# Altium PCB NEH.PcbDoc
Units mm, origin at the board's own origin, x right, y up, seen from the top; angles counter-clockwise.
Board outline 18 x 13 mm, 2 copper layers (Top Layer, Bottom Layer), stack 1.095 mm thick; 14 components, 21 nets, 49 pads, 0 vias.
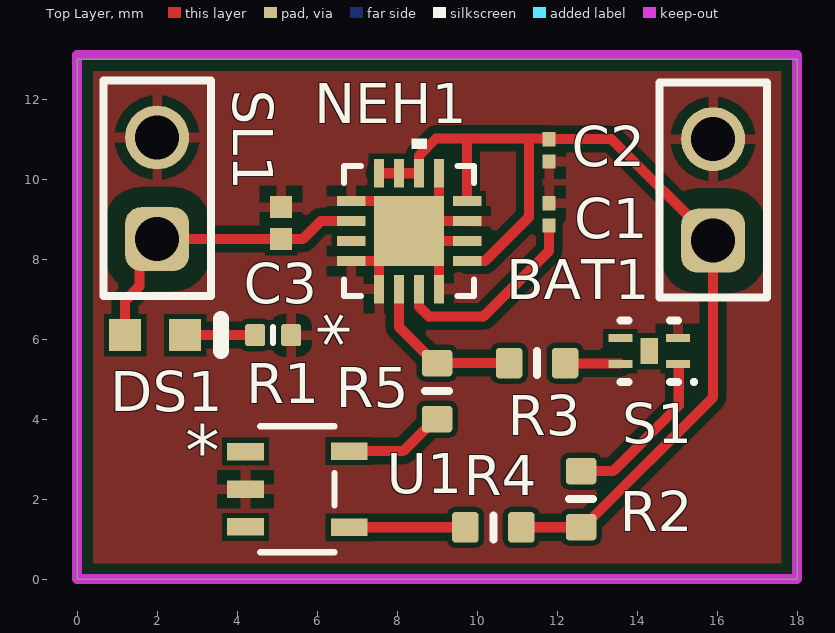
[diagram p0: Top Layer view]
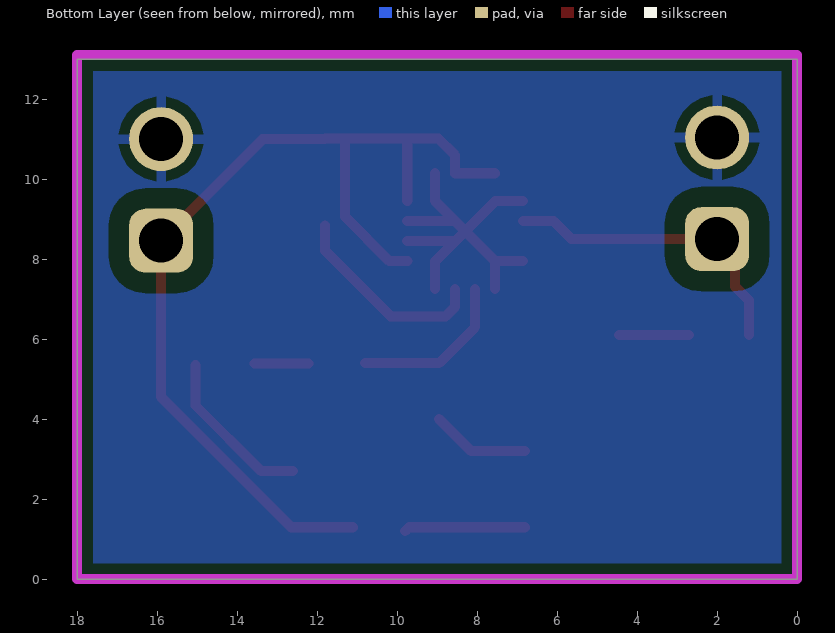
[diagram p1: Bottom Layer view, seen from below]
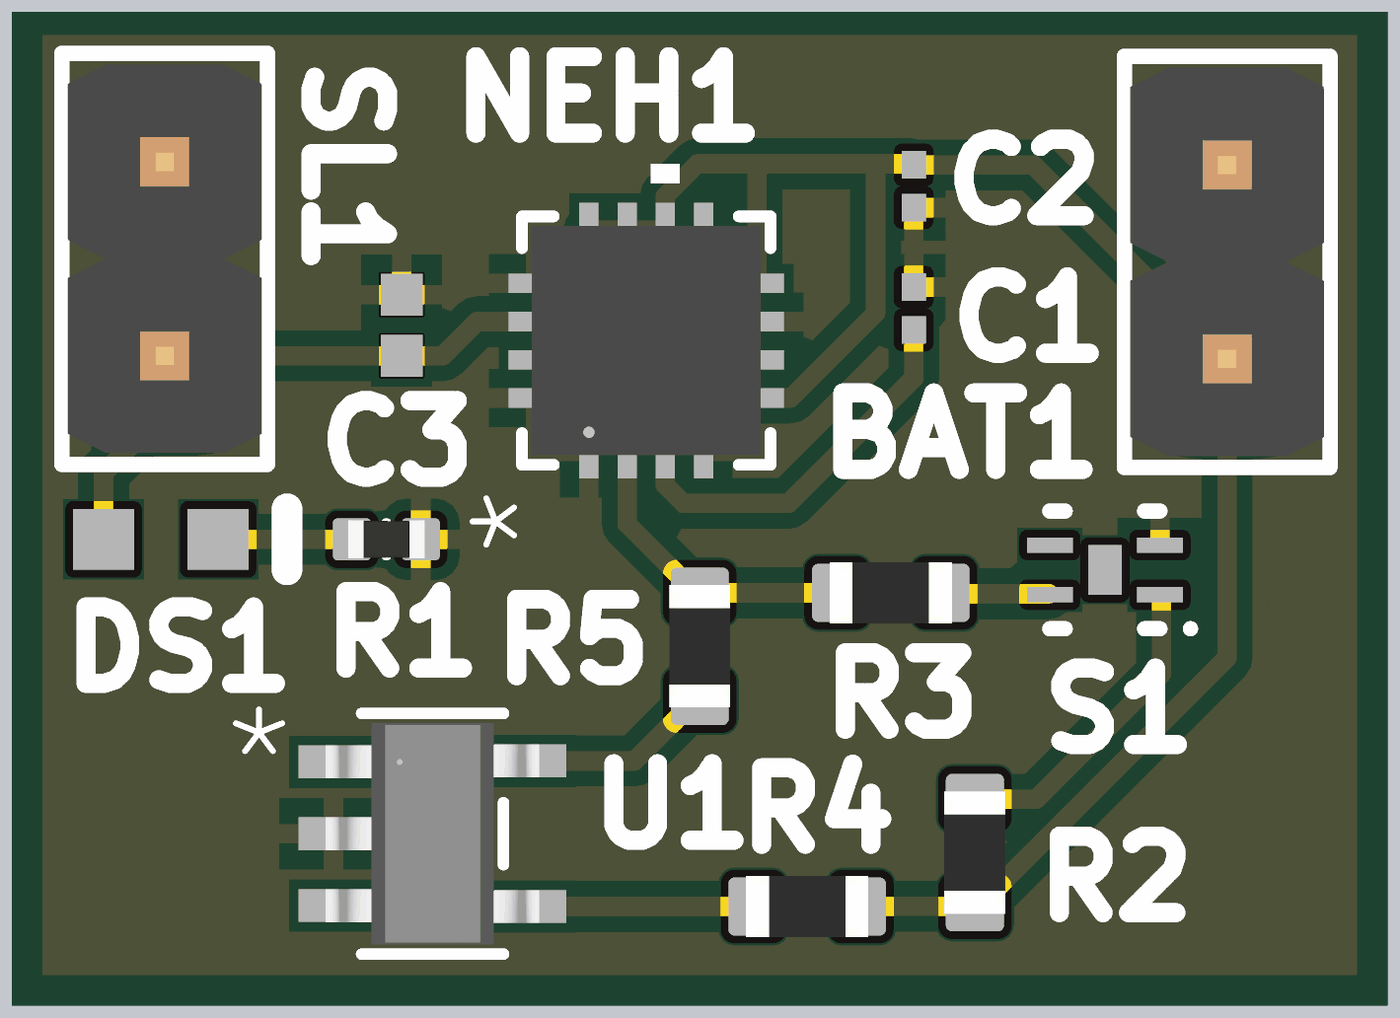
[diagram p2: 3D render of the assembled board from above, using the file's embedded part models]

## Layer stack, top to bottom
Top Solder: solder mask 0.0102, Solder Resist, Dk 3.5
Top Layer: signal copper 0.0152
Dielectric 1: dielectric 1.065, FR-4, Dk 4.8
Bottom Layer: signal copper 0.0152
Bottom Solder: solder mask 0.0102, Solder Resist, Dk 3.5

## Board outline
0,0 18,0 18,13 0,13

## Design rules (kind name [scope] priority, off if disabled: settings)
Clearance [All] p1: gap=0.2 ignorepadtopadclearanceinfootprint=FALSE except(0.127: SMDPad-SMDPad SMDPad-THPad SMDPad-Via SMDPad-Fill SMDPad-Poly SMDPad-Region SMDPad-Text; 0.254: Arc-Via Track-Via Via-Via; 0.5: Arc-Hole Track-Hole SMDPad-Hole THPad-THPad THPad-Via THPad-Fill THPad-Poly THPad-Region THPad-Text THPad-Hole Via-Hole Fill-Hole Poly-Hole Region-Hole Text-Hole)
MinimumSolderMaskSliver [All] p1: minsoldermaskwidth=0.1
PolygonConnect [All] p1: connectstyle=Relief reliefconductorwidth=0.254 reliefentries=4 polygonreliefangle="90 Angle" airgapwidth=0.254
RoutingVias [All] p1: holewidth=0.3 width=0.5 viastyle="Through Hole" minholewidth=0.3 minwidth=0.5 maxholewidth=0.3 maxwidth=0.5
SilkToSolderMaskClearance [IsPad] p1: minsilkscreentomaskgap=0.1 clearancetoexposedcopper=TRUE
SolderMaskExpansion [All] p1: expansion=0.102 istentingtop=FALSE
Width [All] p1: maxlimit=0.3 minlimit=0.127 preferedwidth=0.254
28 further rules are at their usual default settings.

## Classes and differential pairs
component class NEH: C1 C2 C3 DS1 NEH1 R1 R2 R3 R4 R5 S1 U1

## Components (designator, comment, footprint, x,y, rotation, side; value= is the part's Value field where it differs from the comment)
BAT1 "Header1" 61300211121 15.9,9.73 r90 top
C1 "0201YD222KAT2A" CAPC0603X33X15LL03T05 11.8,9.12 r270 top value=2.2nF
C2 "0201YD222KAT2A" CAPC0603X33X15LL03T05 11.8,10.72 r90 top value=2.2nF
C3 "Cap" rlc_402_smd_small 5.1,8.9 r90 top value=5.6nF
DS1 "19-217/R6C-AL1M2VY/3T" EVRL-0603-2_V 1.95,6.1 r0 top
NEH1 "NEH2000BYJ" HWQFN16_SOT8076-1_NEX 8.3,8.7 r90 top
R1 "330R2J" RESC0402(1005)_L 4.9,6.1 r0 top value=330
R2 "Jumper 0603" RESC0603(1608)_L 12.6,2 r90 top value=0
R3 "Jumper 0603" RESC0603(1608)_L 11.5,5.4 r0 top value=0
R4 "Jumper 0603" RESC0603(1608)_L 10.405,1.295 r0 top value=NC
R5 "Jumper 0603" RESC0603(1608)_L 9,4.7 r90 top value=NC
S1 "S-1000C42-I4T1U" SON65P140X48_HS-5N 14.3,5.7 r180 top
SL1 "Header2" 61300211121 2,9.77 r90 top (schematic designator SOLAR1)
U1 "BU52025G-TR" SSOP5_ROM 5.505,2.247 r0 top

## Footprints (in the part's own frame and the unit in brackets; to place one, negate y for a bottom-side part, rotate by r counter-clockwise, add the part's x,y. Pads: shape width x height; smd on the part's side, far side on the other; paste and mask are expansions set on the pad)
61300211121 [mm] "Pin Header, pitch 2.54 mm, THT, Vertical, single row, 2p"
  rrect50% 1.6x1.6 hole 1.1: 1(-1.27,0)
  round 1.6 hole 1.1: 2(1.27,0)
  silkscreen extent -2.69,-1.35 2.69,1.35, body extent -2.54,-1.27 2.54,1.27, height 8.57
CAPC0603X33X15LL03T05 [mm] "Chip Capacitor, 2-Leads, Body 0.60x0.30mm, IPC High Density"
  rect 0.36x0.32 smd: 1(-0.28,0) 2(0.28,0)
  body extent -0.32,-0.17 0.32,0.17, height 0.33
EVRL-0603-2_V [mm] "SMD, 2-Leads, Body 1.6x0.8mm"
  rect 0.8x0.8 smd: 1(-0.75,0) 2(0.75,0)
  silkscreen extent 1.65,-0.4 1.65,0.4, body extent -0.8,-0.4 0.8,0.4, height 0.5
HWQFN16_SOT8076-1_NEX [mil]
  rect 28x10 smd paste+0 mask+0: 1(-57,29.53) 2(-57,9.84) 3(-57,-9.85) 4(-57,-29.54) 9(57,-29.54) 10(57,-9.85) 11(57,9.84) 12(57,29.53)
  rect 10x28 smd paste+0 mask+0: 5(-29.54,-57) 6(-9.85,-57) 7(9.84,-57) 8(29.53,-57) 13(29.53,57) 14(9.84,57) 15(-9.85,57) 16(-29.54,57)
  rect 69x69 smd paste+0 mask+0: 17(0,0)
  silkscreen extent -64,-64 91,64, body extent -59,-59 59,59, height 32
RESC0402(1005)_L [mm] "Chip Resistor, Body 1.0x0.5mm, IPC High Density"
  rrect25% 0.5x0.55 smd: 1(-0.45,0) 2(0.45,0)
  silkscreen extent 0,-0.2 0,0.2, body extent -0.5,-0.25 0.5,0.25, height 0.3
RESC0603(1608)_L [mm] "Chip Resistor, Body 1.6x0.8mm, IPC High Density"
  rrect25% 0.66x0.76 smd: 1(-0.7,0) 2(0.7,0)
  silkscreen extent 0,-0.3 0,0.3, body extent -0.8,-0.4 0.8,0.4, height 0.45
rlc_402_smd_small [mm] "Chip SMD component 402; Body 1.0 x 0.5 mm (LxW typ);small footprint"
  rect 0.55x0.55 smd mask+0.025: 1(-0.4,0) 2(0.4,0)
  body extent -0.5,-0.25 0.5,0.25, height 0.6
SON65P140X48_HS-5N [mm] "SON, 4-Leads, Body 1.20x1.40mm, Pitch 0.65mm, Thermal Pad 0.65x0.44mm, IPC Medium Density"
  rect 0.6x0.2 smd: 1(-0.72,0.325) 2(-0.72,-0.325) 3(0.72,-0.325) 4(0.72,0.325)
  rect 0.44x0.65 smd: 5(0,0)
  silkscreen extent -1.17,-0.77 0.72,0.82, body extent -0.72,-0.62 0.72,0.62, height 0.48
SSOP5_ROM [mil]
  rect 36x17 smd paste+0 mask+0: 1(-51,37) 2(-51,0) 3(-51,-37) 4(51,-37.5) 5(51,37.5)
  silkscreen extent -36,-62 36,62, body extent -55,-57 55,57, height 49

## Part data
BAT1 SL1: library part CMP-002-00071-1, "Board Connector, 2 Contact(s), 1 Row(s), Male, Straight, 0.1 inch Pitch, Solder Terminal, Locking, Black Insulator, Plug", Max Operating Temperature=125°C, Min Operating Temperature=-40°C, Connector Type="BOARD CONNECTOR", Mounting Technology=Board, RoHS Compliant=Yes
C1 C2: library part CMP-001-00084-1, "Ceramic Capacitor, Multilayer, Ceramic, 16V, 10% +Tol, 10% -Tol, X5R, 15% TC, 0.0022uF, Surface Mount, 0201", Capacitor Type=Ceramic, Case/Package=0201, Max Operating Temperature=85°C, Min Operating Temperature=-55°C, Mounting Technology="Surface Mount", Pins=2, RoHS Compliant=Yes
C3: "Capacitor SMD", LatestRevisionDate="05-oct-2007  -  Semtech", LatestRevisionNote="Re-released for DXP Platform.", Published=8-Jun-2000, Publisher="Altium Limited"
DS1: library part CMP-007-00004-2, "Chip LED, Red, 5 V, 25 mA, -40 to 85 degC, 2-Pin SMD (0603), RoHS, Tape and Reel", Case/Package=0603, Colour=Red, Forward Voltage=2.2V, Manufacturer="Everlight Electronics", Package Description="2-Pin Surface Mount Device, Body 1.6 x 0.8 mm", Datasheet URL=https://datasheet.ciiva.com/4688/el-19-217-r6c-al1m2vy-3tpdf-187026-4688713.pdf, Datasheet Version="Rev. 1, 01/2005", Lens Style=Clear, Manufacturer URL=http://www.everlight.com/, Mounting Technology=SM, Package Reference=0603, RoHS Compliant=False
NEH1: "No Description Available", Mfr_Name=Nexperia, Copyright="Copyright (C) 2023 Ultra Librarian. All rights reserved.", Manufacturer_Part_Number=NEH2000BYJ, RefDes=RefDes, Type=DEV
R1: library part CMP-009-00095-2, "330R 0.063W 5% 0402 (1005 Metric)  SMD", Case/Package=0402, Power=63mW, Tolerance=5%, Mounting Technology=SMT, Pins=2
R2 R3 R4 R5: library part CMP-009-00175-3, Case/Package=0603, Max Operating Temperature=155°C, Min Operating Temperature=-55°C, Pins=2
S1: library part CMP-00029-00001-4, "Voltage Detector"
U1: "No Description Available", Mfr_Name="ROHM Semiconductor", RefDes=RefDes, Type=Type

## Nets (pads, with @x,y where several pads share a name; then routed paths per layer and width w, separated by ;. In a path a pad name is that pad's centre, name@x,y a point inside that pad or via, vN(x,y) a via of type N, cw(c..) or ccw(c..) an arc to the next point about the centre after c; other vN are vias at no path point)
BAT_OUT: BAT1.1 C2.2 NEH1.5 NEH1.8 NEH1.10 NEH1.11 NEH1.12 R2.1 R4.2 | length 25.6
  Top Layer w0.254: NEH1.12 NEH1.11 NEH1.10 8.55,10.593 8.971,11.014 9.748,11.014 9.848,11.014 ; NEH1.5 10.193,7.95 11.3,9.057 11.3,11.014 ; NEH1.8 9.748,10.914 9.848,11.014 ; R4.2 11.108,1.298 12.647,1.298 15.9,4.55 BAT1.1 13.36,11 C2.2 ; C2.2@11.786,11.014 11.3,11.014 ; 9.848,11.014 11.3,11.014
GND: BAT1.2 C1.1 C2.1 C3.2 NEH1.1 NEH1.4 NEH1.6 NEH1.7 NEH1.9 NEH1.13 NEH1.16 NEH1.17 R1.2 S1.2 SL1.2 U1.2 | length 10.2
  Top Layer w0.2: SL1.2@2.016,11.04 SL1.2 SL1.2@2.03,11.07
  Top Layer w0.254: NEH1.16 NEH1.17@7.55,7.95 ; NEH1.13 7.55,9.45 NEH1.17 ; NEH1.1 NEH1.17@7.55,7.95 ; NEH1.4 9.05,7.95 NEH1.17@8.55,8.45 ; NEH1.9 9.05,9.45 NEH1.17@8.55,8.95 ; NEH1.6 NEH1.17@8.55,8.45 ; NEH1.7 NEH1.17@8.55,8.95 ; NEH1.17@7.55,7.95 NEH1.17 ; NEH1.17 NEH1.17@8.55,8.95 ; NEH1.17 NEH1.17@8.55,8.45
NetC1_2: C1.2 NEH1.3 | length 5.1
  Top Layer w0.254: NEH1.3 8.55,6.807 8.788,6.57 10.162,6.57 11.8,8.207 C1.2
NetC4_1: 
NetC6_1: 
NetC7_1: 
NetDS1_2: DS1.2 R1.1 | length 1.7
  Top Layer w0.254: DS1.2 R1.1
NetI2C_2: 
NetI2C_3: 
NetI2C_4: 
NetJ1_1: 
NetL1_1: 
NetL1_2: 
NetNBM_9: 
NetNEH1_2: NEH1.2 R3.1 R5.2 | length 4.1
  Top Layer w0.254: NEH1.2 8.05,6.3 8.95,5.4 R3.1
NetR2_2: R2.2 S1.1 | length 4.1
  Top Layer w0.254: R2.2 13.4,2.7 15.04,4.34 S1.1@15.04,5.348
NetR3_2: R3.2 S1.4 | length 1.4
  Top Layer w0.254: R3.2@12.213,5.388 S1.4@13.568,5.388
NetR4_1: R4.1 U1.4 | length 3
  Top Layer w0.254: U1.4 R4.1 R4.1@9.8,1.2
NetR5_1: R5.1 U1.5 | length 2.5
  Top Layer w0.254: U1.5 8.15,3.2 R5.1@8.95,4
SOLAR_IN: C3.1 DS1.1 NEH1.14 SL1.1 | length 7.8
  Top Layer w0.254: DS1.1 1.2,6.963 1.556,7.319 1.556,8.056 SL1.1 C3.1 5.637,8.5 6.087,8.95 NEH1.14
VSS: 
pads on no net: NEH1.15 S1.3 S1.5 U1.1 U1.3

## Polygon pours and split planes (outlines as drawn)
GND on Bottom Layer "GND_L02_P001" (solid, pour order 1): 0.4,12.7 17.6,12.7 17.6,0.4 0.4,0.4
GND on Top Layer "GND_L01_P000" (solid, remove dead copper, pour order 0): 0.4,12.7 17.6,12.7 17.6,0.4 0.4,0.4

## Keep-outs
Keep-Out Layer:
  lines w0.254: 0,0 18,0 18,13.1 0,13.1 0,0

## Silkscreen, mask and mechanical layers (free items; w line width, h text height)
Mechanical 1:
  lines w1.2: 0.2,0.2 17.8,0.2 17.8,12.9 0.5,12.9 0.2,12.9 0.2,9.725 0.2,3.375 0.2,0.2

## Text inside footprints (layer, text, board x,y; h text height)
NEH1: Top Overlay "*" at 7.3,5.8 h1.27 r90; Top 3D Body "*" at 8.185,8.078 h1.27 r90
U1: Top Overlay "*" at 2.7,2.6 h1.27